# Altium PCB Control_Motor_Ciruit.PcbDoc
Units mil, origin at the board's own origin, x right, y up, seen from the top; angles counter-clockwise.
Board outline 5945 x 5270 mil, 2 copper layers (Top Layer, Bottom Layer); 47 components, 42 nets, 189 pads, 0 vias.
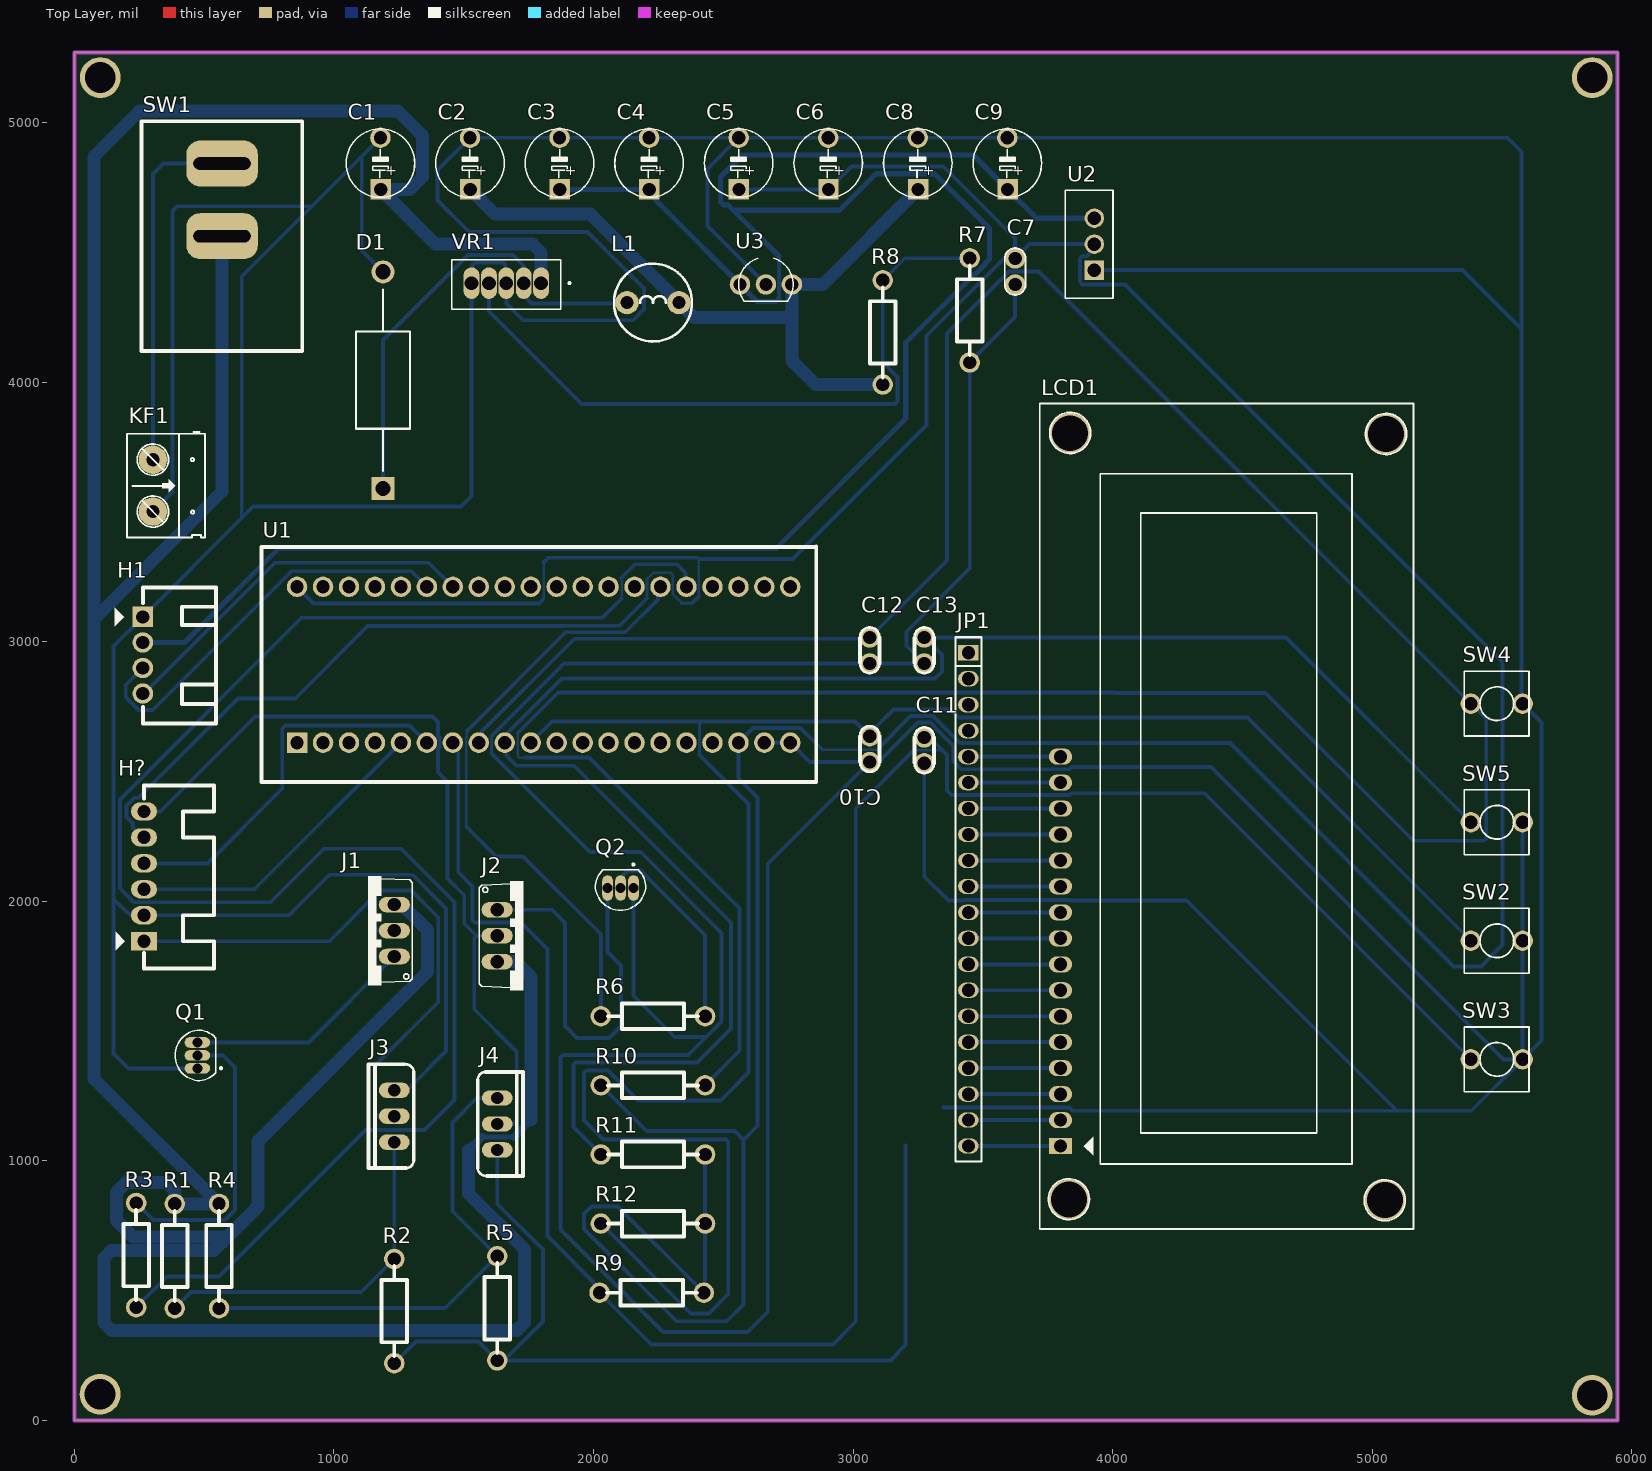
[diagram p0: Top Layer view]
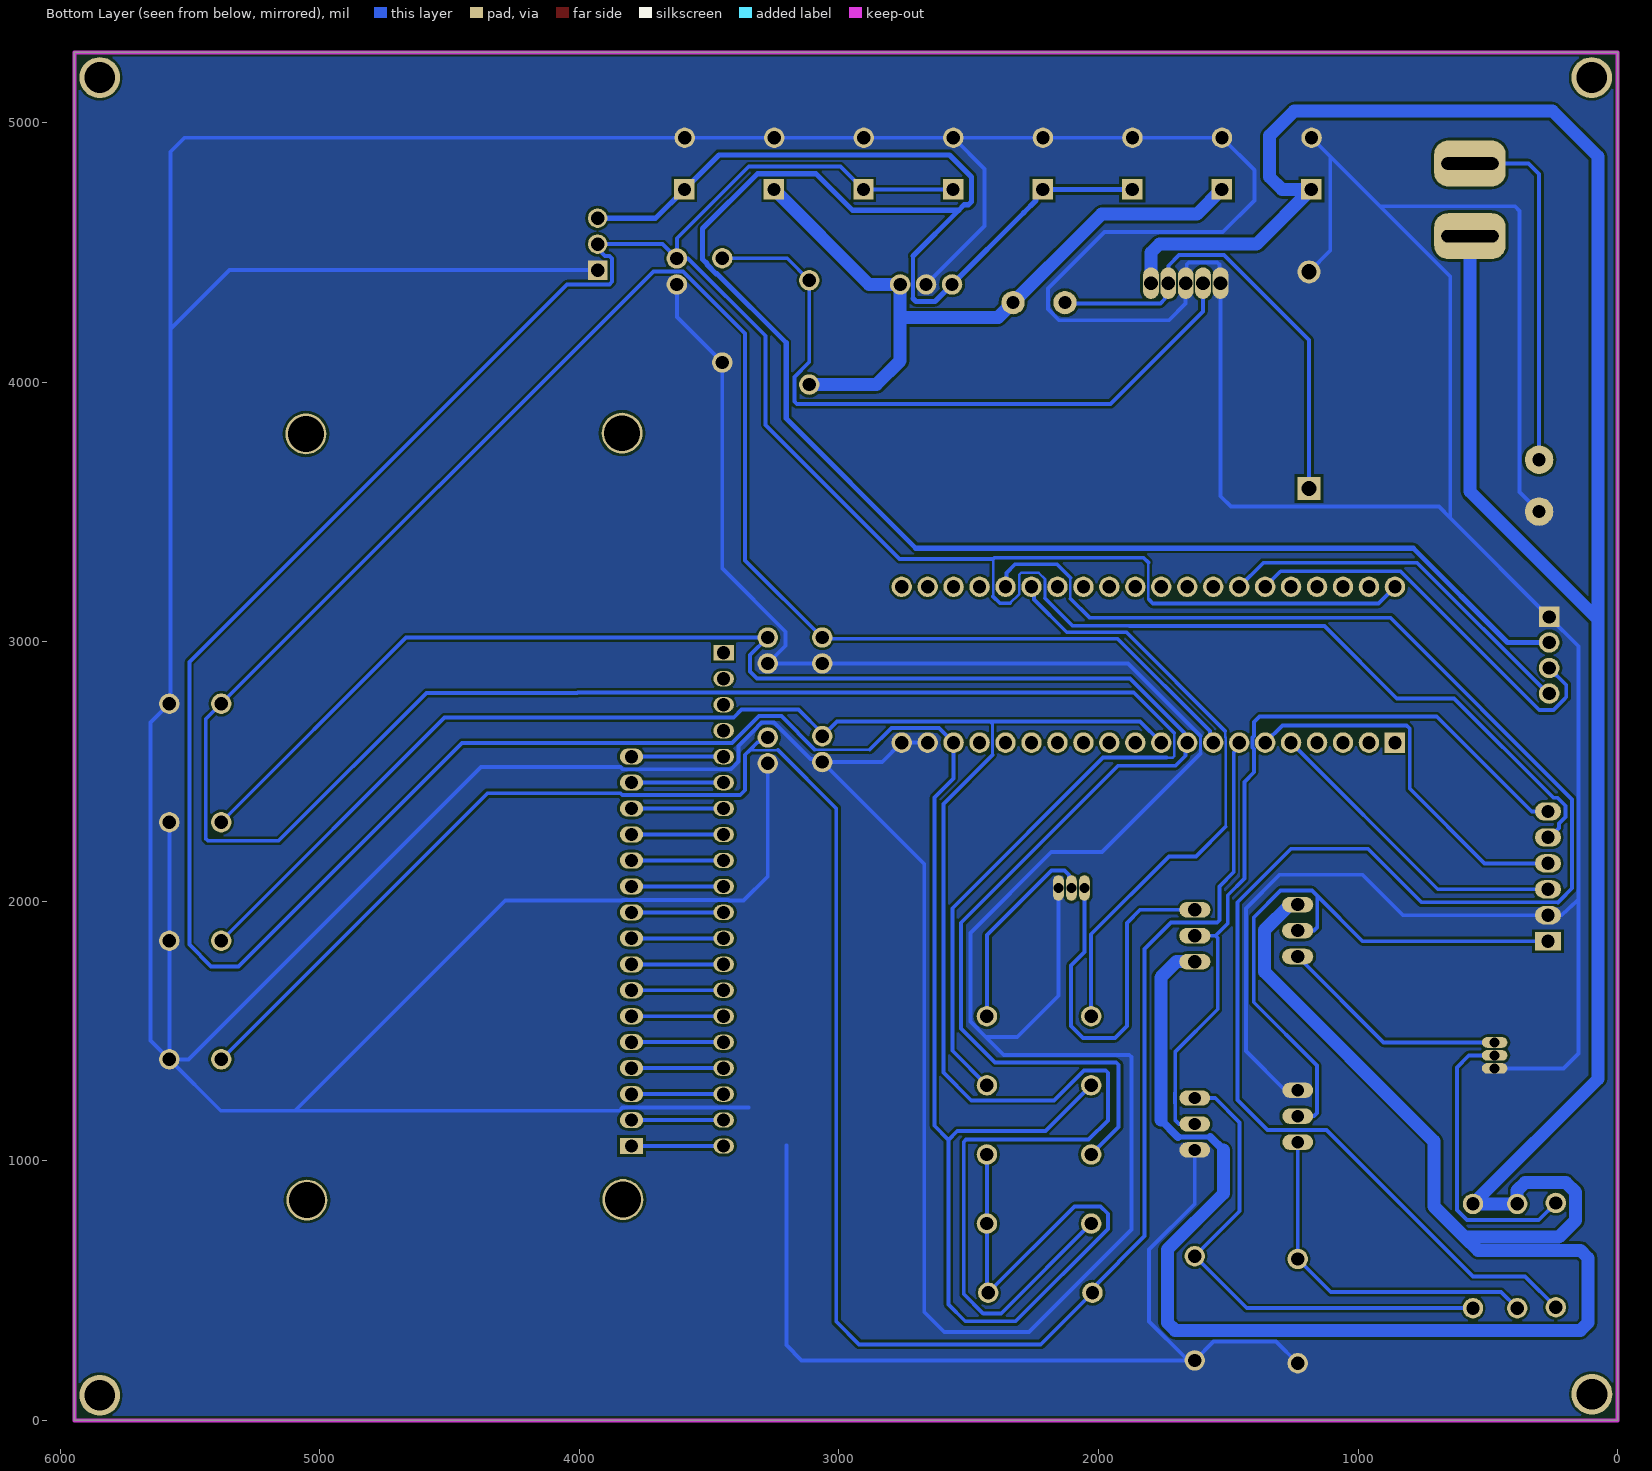
[diagram p1: Bottom Layer view, seen from below]
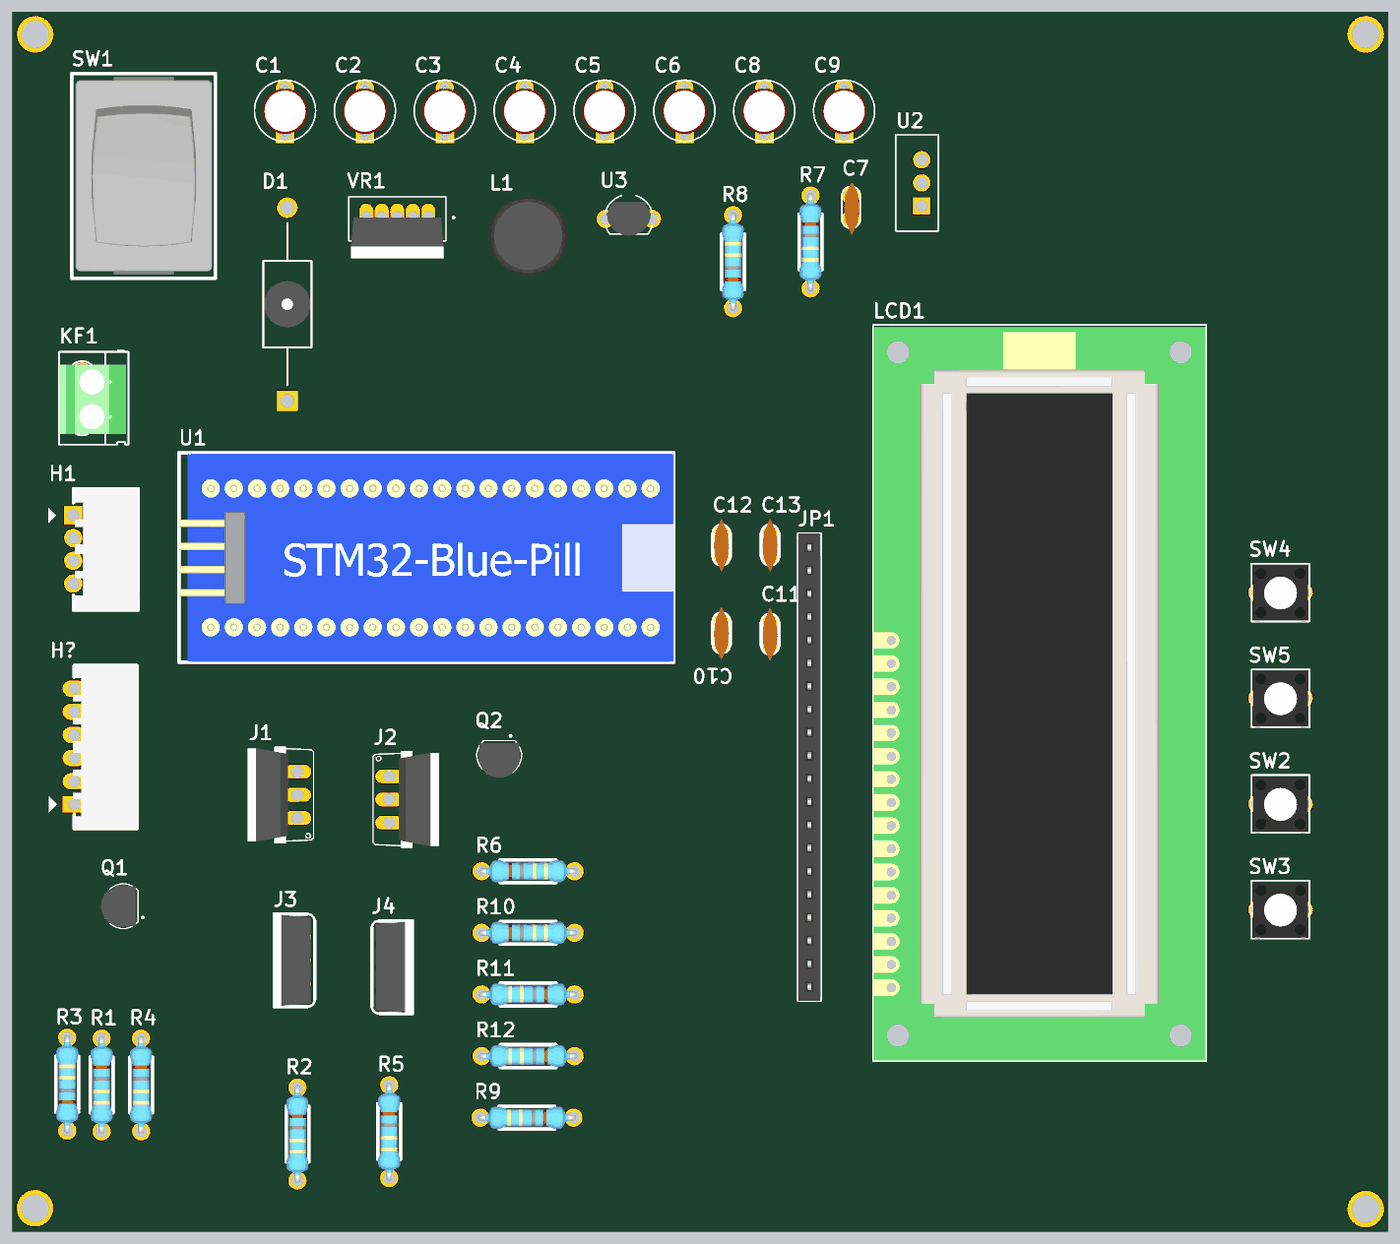
[diagram p2: 3D render of the assembled board from above, using the file's embedded part models]

## Layer stack, top to bottom
Top Solder: solder mask 0.4, Solder Resist, Dk 3.5
Top Layer: signal copper 1.4
Dielectric 1: dielectric 12.6, FR-4, Dk 4.8
Bottom Layer: signal copper 1.4
Bottom Solder: solder mask 0.4, Solder Resist, Dk 3.5

## Board outline
0,0 5945,0 5945,5270 0,5270

## Design rules (kind name [scope] priority, off if disabled: settings)
Clearance [All] p1: gap=10 ignorepadtopadclearanceinfootprint=FALSE
PolygonConnect PolygonConnect_2 [All vs IsNamedPolygon('GND_L02_P000')] p1: thpad.connectstyle=Direct thpad.reliefconductorwidth=10 thpad.reliefentries=4 thpad.polygonreliefangle="90 Angle" thpad.airgapwidth=10 smdpad.connectstyle=Relief smdpad.reliefconductorwidth=10 smdpad.reliefentries=4 smdpad.polygonreliefangle="90 Angle" smdpad.airgapwidth=10 via.connectstyle=Direct via.reliefconductorwidth=10 via.reliefentries=4 via.polygonreliefangle="90 Angle" via.airgapwidth=10
PolygonConnect PolygonConnect_1 [All vs IsNamedPolygon('GND_L02_P000')] p2: thpad.connectstyle=Direct thpad.reliefconductorwidth=10 thpad.reliefentries=4 thpad.polygonreliefangle="90 Angle" thpad.airgapwidth=10 smdpad.connectstyle=Relief smdpad.reliefconductorwidth=10 smdpad.reliefentries=4 smdpad.polygonreliefangle="90 Angle" smdpad.airgapwidth=10 via.connectstyle=Direct via.reliefconductorwidth=10 via.reliefentries=4 via.polygonreliefangle="90 Angle" via.airgapwidth=10
PolygonConnect [All] p3: connectstyle=Relief reliefconductorwidth=10 reliefentries=4 polygonreliefangle="90 Angle" airgapwidth=10
RoutingVias [All] p1: holewidth=51.18 width=50 viastyle="Through Hole" minholewidth=51.18 minwidth=50 maxholewidth=59.06 maxwidth=50
SolderMaskExpansion [All] p1: expansion=4 istentingtop=FALSE
Width [All] p1: maxlimit=60 minlimit=10 preferedwidth=15 toplayer_minwidth=15 minimp=50.000000 maximp=50.000000 favimp=50.000000
30 further rules are at their usual default settings.

## Components (designator, comment, footprint, x,y, rotation, side; value= is the part's Value field where it differs from the comment)
C1 "100uF" CA-ALU-5R 1179,4841 r90 top
C2 "300uF" CA-ALU-5R 1524,4841 r90 top
C3 "22uF" CA-ALU-5R 1869,4841 r90 top
C4 "100uF" CA-ALU-5R 2214,4841 r90 top
C5 "100uF" CA-ALU-5R 2559,4841 r90 top
C6 "22uF" CA-ALU-5R 2904,4841 r90 top
C7 "104" CN1 3624,4476 r270 top
C8 "100uF" CA-ALU-5R 3249,4841 r90 top
C9 "100uF" CA-ALU-5R 3594,4841 r90 top
C10 "105" "tu gom" 3064,2586 r270 top
C11 "105" "tu gom" 3274,2581 r270 top
C12 "105" "tu gom" 3064,2966 r270 top
C13 "105" "tu gom" 3274,2966 r270 top
D1 "1N5822" DIOAD2120W130L950D530P 1189,4007 r90 top
H1 "Header 4P 2.54 Duc Cong" "Header 4P DC 2.54" 265.02,3094.28 r0 top
H? "Header 6P 2.54 Duc Cong" "Header 6P DC 2.54" 268.5,1846 r0 top
J1 "IRF9630" TO220V 1132.49,1887 r90 top
J2 "IRF9630" TO220V 1729,1867 r270 top
J3 "IRFZ44EPBF" TO-220 1232.49,1172 r90 top
J4 "IRFZ44EPBF" TO-220 1629,1142 r270 top
JP1 "JP 1x20 2.54" "JP 1x20 CT" 3444,2957 r270 top
KF1 "CON 2 KF301" "Con 2 KF301 5.08" 302.77,3701 r270 top
L1 "68uH 3A" "CUON CAM 100uH3A" 2229,4306 r0 top
LCD1 "LCD16x2A" LCD16X2 3799,1057 r90 top
Q1 "2N3904" TO92127P495H495-3 474,1406 r90 top
Q2 "2N3904" TO92127P495H495-3 2104,2051 r180 top
R1 "1.5k" "tro vach 1/4w" 386.86,633.35 r90 top
R2 "10k" "tro vach 1/4w" 1232.49,421.21 r90 top
R3 "5k" "tro vach 1/4w" 238.21,636.89 r270 top
R4 "1.5k" "tro vach 1/4w" 557.29,633.35 r90 top
R5 "10k" "tro vach 1/4w" 1629,432 r90 top
R6 "5k" "tro vach 1/4w" 2229,1557 r180 top
R7 "3k" "tro vach 1/4w" 3449,4276 r90 top
R8 "12k" "tro vach 1/4w" 3114,4191 r270 top
R9 "10k" "tro vach 1/4w" 2224,492 r0 top
R10 "10k" "tro vach 1/4w" 2229,1290.75 r180 top
R11 "10k" "tro vach 1/4w" 2229,1024.5 r0 top
R12 "10k" "tro vach 1/4w" 2229,758.25 r0 top
SW1 "SWITCH 10A-2PIN" SW_2ARS_TH 568,4839.53 r0 top
SW2 "SW" SW2 5579,1847.67 r180 top value="SW chip 2 pin"
SW3 "SW" SW2 5579,1391 r180 top value="SW chip 2 pin"
SW4 "SW" SW2 5579,2761 r180 top value="SW chip 2 pin"
SW5 "SW" SW2 5579,2304.33 r180 top value="SW chip 2 pin"
U1 "Bluepill" "Blue Pill" 858,3211 r270 top
U2 "LM1117T-ADJ" TO254P470X1016X2222-3P 3889,4631 r90 top
U3 "78L05_5V" TO-92 2664,4376 r0 top
VR1 "LM2576T-ADJ" TO170P1067X483X1651-5 1664,4381 r180 top

## Footprints (in the part's own frame and the unit in brackets; to place one, negate y for a bottom-side part, rotate by r counter-clockwise, add the part's x,y. Pads: shape width x height; smd on the part's side, far side on the other; paste and mask are expansions set on the pad)
"Blue Pill" [mm]
  round 2 hole 1.3: 1(0,48.26) 2(0,45.72) 3(0,43.18) 4(0,40.64) 5(0,38.1) 6(0,35.56) 7(0,33.02) 8(0,30.48) 9(0,27.94) 10(0,25.4) 11(0,22.86) 12(0,20.32) 13(0,17.78) 14(0,15.24) 15(0,12.7) 16(0,10.16) 17(0,7.62) 18(0,5.08) 19(0,2.54) 20(0,0) 22(15.24,2.54) 23(15.24,5.08) 24(15.24,7.62) 25(15.24,10.16) 26(15.24,12.7) 27(15.24,15.24) 28(15.24,17.78) 29(15.24,20.32) 30(15.24,22.86) 31(15.24,25.4) 32(15.24,27.94) 33(15.24,30.48) 34(15.24,33.02) 35(15.24,35.56) 36(15.24,38.1) 37(15.24,40.64) 38(15.24,43.18) 39(15.24,45.72) 40(15.24,48.26)
  rect 2x2 hole 1.3: 21(15.24,0)
  silkscreen extent -3.94,-3.48 19.08,50.8, body extent -3.81,-3.48 19.05,50.8, height 3.56
CA-ALU-5R [mm]
  rect 2x2 hole 1.3: 1(-2.515,-0.025)
  round 2 hole 1.3: 2(2.54,0)
  silkscreen extent -3.3,-3.35 3.4,3.35, body extent -2.75,-2.5 2.75,2.5, height 14
CN1 [mm]
  round 2 hole 1.3: 1(0,0) 2(2.54,0)
  silkscreen extent -1.01,-1.02 3.58,1.02, body extent -1.52,-0.76 4.32,0.93, height 6.73
"Con 2 KF301 5.08" [mil]
  round 110 hole 51.18: 1(0,0) 2(200,0)
  silkscreen extent -106,-100 300,200, body extent -45,-97 255,190, height 335
"CUON CAM 100uH3A" [mil] "100uH3A"
  round 90 hole 51.18: 1(-100,0) 2(100,0)
  silkscreen extent -150,-150 150,150, body extent -171,-175 171,167, height 394
DIOAD2120W130L950D530P [mm]
  round 2.25 hole 1.5: A(10.6,0)
  rect 2.25x2.25 / inner round 2.25 / far side rect 2.25x2.25 hole 1.5: C(-10.6,0)
  silkscreen extent -8.89,-2.65 8.89,2.65, body extent -2.54,-2.54 2.54,2.54, height 30.16
"Header 4P DC 2.54" [mm]
  rect 2x2 hole 1.3: 1(-0.025,0.025)
  round 2 hole 1.3: 2(-0.025,-2.475) 3(-0.025,-4.975) 4(-0.025,-7.475)
  silkscreen extent -2.78,-10.39 7.11,2.92, body extent 0.13,-10.48 7.06,3.11, height 7.38
"Header 6P DC 2.54" [mil]
  rect 100x70 hole 51.18: 1(0,0)
  oval 100x70 hole 51.18: 2(0,100) 3(0,200) 4(0,300) 5(0,400) 6(0,500)
  silkscreen extent -110,-105 270,600, body extent -7,-110 278,605, height 227
"JP 1x20 CT" [mm] "20 row, straight, gold plating"
  rect 1.5x2 hole 1.3: 1(0,0)
  oval 1.5x2 hole 1.3: 2(2.54,0) 3(5.08,0) 4(7.62,0) 5(10.16,0) 6(12.7,0) 7(15.24,0) 8(17.78,0) 9(20.32,0) 10(22.86,0) 11(25.4,0) 12(27.94,0) 13(30.48,0) 14(33.02,0) 15(35.56,0) 16(38.1,0) 17(40.64,0) 18(43.18,0) 19(45.72,0) 20(48.26,0)
  silkscreen extent -1.52,-1.27 49.78,1.27, body extent -1.52,-1.25 49.78,1.25, height 8.51
LCD16X2 [mil] "LCD dipslay 16x2, 16 pin"
  rect 62x90 hole 51.18: 1(0,0)
  oval 62x90 hole 51.18: 2(100,0) 3(200,0) 4(300,0) 5(400,0) 6(500,0) 7(600,0) 8(700,0) 9(800,0) 10(900,0) 11(1000,0) 12(1100,0) 13(1200,0) 14(1300,0) 15(1400,0) 16(1500,0)
  round 157.48 hole 137.8: "Hole 0"(-208,-1250) "Hole 0"(-206,-33) "Hole 0"(2743,-1254) "Hole 0"(2746,-36)
  silkscreen extent -320,-1360 2860,80, body extent -318,-1357 2851,80, height 670
SW2 [mm] "SW button 2pin, 250x 250 mil"
  round 2 hole 1.3: 1(0,0) 2(5.08,0)
  silkscreen extent -0.64,-3.17 5.72,3.18, body extent -0.46,-2.95 5.54,3.25, height 5
SW_2ARS_TH [mm] "CASE: TH"
  rrect60% 7x4.5 hole 1.2 slot 5.6 at 0 deg mask+0.076: 1(0.025,0.051) 2(0.025,-7.049)
  silkscreen extent -7.87,-18.29 7.87,4.19, body extent -7.47,-17.9 7.53,3.8, height 17.81
TO170P1067X483X1651-5 [mm]
  oval 1.55x3.1 hole 1.34: 1(-3.4,0) 2(-1.7,0) 3(0,0) 4(1.7,0) 5(3.4,0)
  silkscreen extent -6.27,-2.29 5.34,2.54, body extent -5.08,0 5.08,4.45, height 16.84
TO220V [mil]
  oval 60x120 hole 51.18: 1(-100,-100) 2(0,-100) 3(100,-100)
  silkscreen extent -210,-170 210,0, body extent -202,-60 202,115, height 783
TO254P470X1016X2222-3P [mil]
  rect 75x75 hole 51.18: 1(-200,-40)
  round 75 hole 51.18: 2(-100,-40) 3(0,-40)
  silkscreen extent -308,-112 108,72
TO92127P495H495-3 [mm]
  oval 1.04x2.5 hole 1: 1(-1.27,0) 2(0,0) 3(1.27,0)
  silkscreen extent -2.48,-2.4 2.48,2.16, body extent -2.28,-1.55 2.28,2.28, height 20.44
TO-92 [mm]
  round 2 hole 1.3: 1(-2.54,0) 2(0,0) 3(2.54,0)
  silkscreen extent -2.66,-1.65 2.66,2.55, body extent -2.41,-1.84 2.41,1.84, height 5.34
TO-220 [mm]
  oval 1.508x3.016 hole 1.2: 1(-2.54,0) 2(0,0) 3(2.54,0)
  silkscreen extent -5.08,-1.91 5.08,2.54, body extent -5.08,-1.47 5.08,2.72, height 20.57
"tro vach 1/4w" [mm]
  round 2 hole 1.3: 1(-5.1,0) 2(5.1,0)
  silkscreen extent -4.39,-1.25 4.42,1.25, body extent -5.38,-1.2 5.38,1.2, height 2.41
"tu gom" [mm] "Tu gom mini"
  round 2 hole 1.3: 1(-1.27,0) 2(1.27,0)
  silkscreen extent -2.25,-0.97 2.22,0.97, body extent -2.92,-0.85 2.92,0.85, height 6.12

## Part data
C1 C2 C8 C9: library part "Tu Nhom 100uF 16V", "Dán", Chung_Loai=Dán, Don_Vi=Con, Ma_Hang=MH002219, So_Chan=2, Ten_Linh_Kien="Tụ Nhôm 100uF 16V 6.3x5.4MM"
C3 C6: library part "Tu tantalum 22uF 25V SMD6032", "Dán", Chung_Loai=Dán, Don_Vi=Con, Ma_Hang=MH002651, So_Chan=2, Ten_Linh_Kien="Tụ tantalum 226E-22uF 25V SMD6032"
C4 C5: library part "Tu tantalum 100uF 10V SMD6032", "Dán", Chung_Loai=Dán, Don_Vi=Con, Ma_Hang=MH007594, So_Chan=2, Ten_Linh_Kien="Tụ tantalum 107A-100uF 10V SMD6032"
C7: library part "Tu 0603 104 50V 10%", "Dán", Chung_Loai=Dán, Don_Vi=Con, Ma_Hang=MH004568, So_Chan=2, Ten_Linh_Kien="Tụ 0603 104-100nF 10% 50V"
C10 C11 C12 C13: library part "Tu gom 104 50V", "Cắm", Chung_Loai=Cắm, Don_Vi=Con, Ma_Hang=MH004761, So_Chan=2, Ten_Linh_Kien="Tụ gốm 104 100nF 50V"
D1: "Diode Schottky 40 V 3A Through Hole DO-201AD", Package="DO-201 STMicroelectronics", Availability="In Stock", Check_prices=https://www.snapeda.com/parts/1N5822/STMicroelectronics/view-part/?ref=eda, MF=STMicroelectronics, MP=1N5822, Price=None, Purchase-URL=https://pricing.snapeda.com/search/part/1N5822/?ref=eda, SnapEDA_Link=https://www.snapeda.com/parts/1N5822/STMicroelectronics/view-part/?ref=snap
H1 H? KF1: "Cắm", Chung_Loai=Cắm, Don_Vi=Con
  H1: Ma_Hang=MH001310, Ten_Linh_Kien="Header 4P XH2.54-4P Đực Cong"
  H?: Ma_Hang=MH003363, Ten_Linh_Kien="Header 6P XH2.54-6P Đực Cong"
  KF1: Ma_Hang=MH000987, Ten_Linh_Kien="CON 2 KF301-2P 5.08MM Xanh Dương"
J1 J2: "Trans MOSFET P-CH 200V 6.5A 3-Pin(3+Tab) TO-220AB Trans MOSFET P-CH 200V 6.5A 3-Pin(3+Tab) TO-220AB Trans MOSFET P-CH 200V 6.5A 3-Pin(3+Tab) TO-220AB", Package="TO-220-3 Vishay", Availability="In Stock", Check_prices=https://www.snapeda.com/parts/IRF9630/Vishay+Siliconix/view-part/?ref=eda, MF="Vishay Siliconix", MP=IRF9630, Price=None, Purchase-URL=https://pricing.snapeda.com/search/part/IRF9630/?ref=eda, SnapEDA_Link=https://www.snapeda.com/parts/IRF9630/Vishay+Siliconix/view-part/?ref=snap
J3 J4: "N-Channel 60 V 48A (Tc) 110W (Tc) Through Hole TO-220AB", Package="TO-220-3 Infineon", Availability="In Stock", Check_prices=https://www.snapeda.com/parts/IRFZ44EPBF/Infineon+Technologies/view-part/?ref=eda, MF=Infineon, MP=IRFZ44EPBF, Price=None, Purchase-URL=https://pricing.snapeda.com/search/part/IRFZ44EPBF/?ref=eda, SnapEDA_Link=https://www.snapeda.com/parts/IRFZ44EPBF/Infineon+Technologies/view-part/?ref=snap
JP1: library part "JP 1x20 2.54 Cai Thang", "Cắm", Chung_Loai=Cắm, Don_Vi=Con, Ma_Hang=MH004006, Ten_Linh_Kien="Jump Đơn Cái 2.54MM 1x20P Thẳng"
L1: library part "CUON CAM 100uH DIP", "Dán", Chung_Loai=Dán, Don_Vi=Con, Ma_Hang=MH002209, Ten_Linh_Kien="Cuộn Cảm 100uH 3A 8x10MM"
LCD1: library part LCD16x2, "LCD dipslay 16 char, 2 line"
Q1 Q2: "TRANS NPN 40V 200MA TO92-3", Package="TO-226-3 Rectron", Availability="In Stock", Check_prices=https://www.snapeda.com/parts/2N3904/Rectron/view-part/?ref=eda, MF=Rectron, MP=2N3904, Price=None, Purchase-URL=https://pricing.snapeda.com/search/part/2N3904/?ref=eda, SnapEDA_Link=https://www.snapeda.com/parts/2N3904/Rectron/view-part/?ref=snap
R1 R3 R4 R6: library part "Tro Vach 1/4W 5% 1.5k", "Cắm", Chung_Loai=Cắm, Don_Vi=Con, Ma_Hang=MH007284, So_Chan=2, Ten_Linh_Kien="Trở Vạch 1/4w 5% 1.5k"
R2 R5 R9 R10 R11 R12: library part "Tro Vach 1/4W 5% 10k", "Căm", Chung_Loai=Cắm, Don_Vi=Con, Ma_Hang=MH007354, So_Chan=2, Ten_Linh_Kien="Trở Vạch 1/4w 5% 10K"
R7: library part "Tro Vach 1/4W 5% 2.2k", "Cắm", Chung_Loai=Cắm, Don_Vi=Con, Ma_Hang=MH007293, So_Chan=2, Ten_Linh_Kien="Trở Vạch 1/4w 5% 2.2k"
R8: library part "Tro Vach 1/4W 5% 12k", "Cắm", Chung_Loai=Cắm, Don_Vi=Con, Ma_Hang=MH007389, So_Chan=2, Ten_Linh_Kien="Trở Vạch 1/4w 5% 12k"
SW1: library part SW1_RS-471005264153-TH, "Rocker Switch SPST 16A (AC), 10A (DC) 250V Panel Mount, Snap-In", Alternate Part Number-1=NA, Case/Package=TH, Manufacturer="Würth Elektronik", Manufacturer Part Number=471005264153, Supplier Part Number-1=471005264153, Supplier-1="Würth Elektronik"
SW2 SW3 SW4 SW5: library part SW2, "Switch button 2 pin"
U1: library part STM32F103C8T6, "STM32F103C8T6"
U2: "Linear Voltage Regulator IC 1 Output 800mA TO-220-3", Package="TO-220 National Semiconductor", Availability=Unavailable, MF="Texas Instruments", MP=LM1117TADJ, Price=None, SnapEDA_Link=https://www.snapeda.com/parts/LM1117TADJ/Texas%20Instruments/view-part/20524/?ref=snap
U3: library part 78L05ACZ, "Linear Voltage Regulator IC Positive Fixed 1 Output 100mA TO-92-3", Package="TO-92 ON", Availability="In Stock", Check_prices=https://www.snapeda.com/parts/78L05ACZ/STMicroelectronics/view-part/?ref=eda, MF=STMicroelectronics, MP=78L05ACZ, Price=None, Purchase-URL=https://pricing.snapeda.com/search/part/78L05ACZ/?ref=eda, SnapEDA_Link=https://www.snapeda.com/parts/78L05ACZ/STMicroelectronics/view-part/?ref=snap
VR1: "SIMPLE SWITCHER&reg; 40V, 3A Low Component Count Step-Down Regulator 5-TO-220 -40 to 125", Package="TO-220-5 Texas Instruments", Availability="In Stock", Check_prices=https://www.snapeda.com/parts/LM2576T-ADJ/Texas+Instruments/view-part/?ref=eda, MF="Texas Instruments", MP=LM2576T-ADJ, Price=None, Purchase-URL=https://pricing.snapeda.com/search/part/LM2576T-ADJ/?ref=eda, SnapEDA_Link=https://www.snapeda.com/parts/LM2576T-ADJ/Texas+Instruments/view-part/?ref=snap

## Free pads (board coordinates)
  round 157.48 hole 118.11: 3(99,101) 3(100,5173) 3(5847,97) 3(5847,5173)

## Nets (pads, with @x,y where several pads share a name; then routed paths per layer and width w, separated by ;. In a path a pad name is that pad's centre, name@x,y a point inside that pad or via, vN(x,y) a via of type N, cw(c..) or ccw(c..) an arc to the next point about the centre after c; other vN are vias at no path point)
5v: C2.1 C8.1 L1.2 R8.2 U3.3 | length 2762.8
  Bottom Layer w50: C2.1 1619.67,4647.33 1987.67,4647.33 2386,4249 2764,4249 ; R8.2 2855.79,3990.21 2764,4082 2764,4249 ; C8.1 2884,4376 U3.3 2764,4249
+12: C1.1 J1.3 J2.3 R1.2 R4.2 SW1.2 VR1.1 | length 15327.1
  Bottom Layer w20: 1569,1092 1694,1092
  Bottom Layer w30: 1518.54,1041.54 1569,1092 ; 1694,1092 1760,1158
  Bottom Layer w50: SW1.2 569,3578 76,3085 ; J1.3 1262.49,1987 1359.5,1889.99 1359.5,1727.5 708,1076 708,824.75 589.25,706 ; 1518.54,1041.54 1518.54,874.46 1734,659 1734,376.29 1704.71,347 143.29,347 114,376.29 114,625.71 143.29,655 538.25,655 589.25,706 ; J2.3 1700,1767 1760,1707 1760,1158 ; VR1.1 1797.86,4498.71 1765.07,4531.5 1390.5,4531.5 C1.1 1293,4742 1341,4790 1341,4949 1246,5044 251,5044 76,4869 76,3085 ; 76,3085 76,1315.43 R4.2 R1.2 386.86,886.14 357,916 199,916 162,879 162,771 227,706 589.25,706
Encoder_A: H?.3 U1.25 | length 1223.5
  Bottom Layer w15: H?.3 693,2046 U1.25
Encoder_B: H?.4 U1.26 | length 1472.3
  Bottom Layer w15: H?.4 513,2146 801,2434 801,2665 813.18,2677.18 1291.82,2677.18 U1.26
GND: C1.2 C2.2 C3.2 C4.2 C5.2 C6.2 C7.2 C8.2 C9.2 C10.2 C11.2 C12.2 C13.2 D1.A H1.1 H?.2 J3.3 J4.3 KF1.2 Q1.1 Q2.1 R2.1 R5.1 R7.1 SW2.1 SW3.1 SW4.1 SW5.1 U1.39 U1.40 U2.1 U3.2 VR1.3 VR1.5 | length 46439.5
  Bottom Layer w10: 1607,2569 1607,2636.89 ; 1886.11,2916 1892,2916
  Bottom Layer w15: KF1.2 378,3576.23 378,4659 396,4677 915,4677 ; Q1.1 207.97,1356 151,1412.97 151,2007.43 ; C1.2 1107,4869 ; D1.A 1107,4506.32 1107,4869 ; R2.1 1316.07,304 1556.21,304 R5.1 ; J3.3 1281,1272 1432,1423 1432,1972 1302,2102 983,2102 827,1946 H?.2 215.71,1946 151,2007.43 ; 1607,2569 1987,2189 2182,2189 2493,1878 2493,1536 2434,1477 ; 1607,2636.89 1886.11,2916 ; J4.3 1629,834 1805.16,657.84 1805.16,381.16 1667.41,243.41 1658.44,243.41 1655.21,240.18 R5.1@1655.21,231.21 ; R5.1@1635.76,231.21 R5.1@1655.21,231.21 ; 1892,2916 C12.2 C13.2 3206,2984 3206,3038 3449,3281 R7.1 3624,4250.21 C7.2 ; Q2.1 2154,1636 2313,1477 2434,1477 ; U1.39 U1.40 2833,2536 C10.2 ; U3.2 2439,4601 2439,4821 C5.2 ; 3202,1059 3202,290 3143.21,231.21 R5.1@1655.21,231.21 ; C11.2 3274,2096 3367,2003 3422.94,2003 3425.44,2005.5 3833.09,2005.5 3835.59,2003 4285,2003 5095,1193 ; 3348.5,1205.5 3833.09,1205.5 3845.59,1193 5095,1193 ; U2.1 5347,4431 5574,4204 ; SW5.1 SW2.1 SW3.1 ; 151,2007.43 151,2982.25 H1.1 645,3476.25 ; 645,3476.25 688.75,3520 1490.14,3520 1530.14,3560 VR1.5 1534.41,4385.27 1534.41,4452.21 1543.2,4461 1650.94,4461 1659.73,4452.21 1659.73,4385.27 VR1.3 1664,4302 1728,4238 2152,4238 2195,4281 2195,4360 1977.16,4577.84 1521.16,4577.84 1399,4700 1399,4816 C2.2 C3.2 C4.2 C5.2 ; 645,3476.25 645,4407 915,4677 ; 915,4677 1107,4869 ; 2434,1477 2365,1408 1881.79,1408 1873,1399.21 1873,735 2267,341 2594,341 2671,418 2671,2143 C10.2 ; C5.2 C6.2 C8.2 C9.2 5520,4941 5574,4887 5574,4204 ; C10.2 3075.75,2547.75 3109.75,2547.75 3249.87,2687.87 3297.56,2687.87 3330.87,2654.56 3330.87,2654.13 3387.13,2597.87 3387.13,2537.52 3416.15,2508.5 3833.09,2508.5 3841.59,2517 4379.11,2517 5505.11,1391 SW3.1 ; 5095,1193 5381,1193 SW3.1 ; 5574,4204 5574,2766 5652,2688 5652,1464 SW3.1
INT_A: C11.1 R9.1 SW3.2 U1.27 | length 8669.1
  Bottom Layer w10: 3235,2582 3340.75,2582 3341.87,2583.13
  Bottom Layer w15: U1.27 1458,2593.75 1479,2572.75 1479,2112 1534,2057 1534,1926.79 1542.79,1918 1720,1918 1822,1816 1822,710 2023.21,508.79 R9.1 2222.21,293 2922,293 3010,381 3010,2357 3235,2582 ; C11.1 3291.25,2631 3310,2612.25 3312.75,2612.25 3341.87,2583.13 3360.83,2564.17 3360.83,2427.46 3379.79,2408.5 3833.09,2408.5 3840.59,2416 4354,2416 SW3.2
INT_B: C12.1 R10.1 SW4.2 U1.28 | length 12297.7
  Bottom Layer w10: 1708,2648.18 1708,2558.86 1713.86,2553 1738,2553
  Bottom Layer w15: U1.28 1570.2,2623.2 1570.2,2655.2 1926,3011 3059,3011 3361,3313 3361,4187 3600,4426 3714,4426 SW4.2 5439,2701 5439,2241.79 5430.21,2233 5158,2233 4589,2802 4007.89,2802 4005.47,2804.42 1883.42,2804.42 1864.24,2804.42 1708,2648.18 ; 1738,2553 1983,2553 2563,1973 2563,1423.96 R10.1
INT_C: C13.1 R11.1 SW5.2 U1.29 | length 7018.7
  Bottom Layer w15: R11.1 1923,1129.71 1923,1370.21 1931.79,1379 2399,1379 2530,1510 2530,1917 1925,2522 1703,2522 1664.75,2560.25 1664.75,2604.25 U1.29 1670.2,2623.2 1670.2,2650.2 1878,2858 3315,2858 3342,2885 3342,2948 C13.1 4667.33,3016 SW5.2
INT_D: C10.1 R12.1 SW2.2 U1.30 | length 8283.3
  Bottom Layer w10: 2408,2563 2408,2684 2409,2685
  Bottom Layer w15: U1.30 1839.87,2692.87 2416.87,2692.87 ; R12.1 2374.46,412 2444,412 2519,487 2519,1073.21 2510.21,1082 2038,1082 1964,1156 1964,1339.21 1972.79,1348 2056,1348 2171,1233 2490,1233 2597,1340 2597,2374 2408,2563 ; 2409,2685 2416.87,2692.87 ; SW2.2 4518.67,2708 3405,2708 3375.13,2737.87 3154.87,2737.87 3064,2647 C10.1 3007.13,2692.87 2416.87,2692.87
NetD1_C: D1.C L1.1 VR1.2 | length 1793.9
  Bottom Layer w15: D1.C 1189,4162 1516,4489 1690,4489 1730.93,4448.07 1730.93,4338.03 1744.67,4324.29 1744.67,4319.26 1761.45,4302.48 2125.48,4302.48 L1.1
NetJ1_1: J1.1 Q1.3 | length 895.6
  Bottom Layer w15: Q1.3 901.49,1456 J1.1
NetJ2_1: J2.1 Q2.3 | length 1485.1
  Bottom Layer w15: J2.1 1840,1967 1890.4,1916.6 1890.4,1520 1936.8,1473.6 2059.36,1473.6 2105.77,1520 2105.77,1752.23 2054,1804 Q2.3
NetJ3_1: J3.1 R1.1 R2.2 | length 1374.1
  Bottom Layer w15: R1.1 449.1,494.81 1105.3,494.81 R2.2 J3.1
NetJ4_1: J4.1 R4.1 R5.2 | length 1953.5
  Bottom Layer w15: R4.1 1428.77,432.56 R5.2 1456,805.79 1456,1148 1550,1242 J4.1
NetJP1_5: JP1.5 LCD1.16 | length 355
  Bottom Layer w15: JP1.5 LCD1.16
NetJP1_6: JP1.6 LCD1.15 | length 355
  Bottom Layer w15: JP1.6 LCD1.15
NetJP1_7: JP1.7 LCD1.14 | length 355
  Bottom Layer w15: JP1.7 LCD1.14
NetJP1_8: JP1.8 LCD1.13 | length 355
  Bottom Layer w15: JP1.8 LCD1.13
NetJP1_9: JP1.9 LCD1.12 | length 355
  Bottom Layer w15: JP1.9 LCD1.12
NetJP1_10: JP1.10 LCD1.11 | length 355
  Bottom Layer w15: JP1.10 LCD1.11
NetJP1_11: JP1.11 LCD1.10 | length 355
  Bottom Layer w15: JP1.11 LCD1.10
NetJP1_12: JP1.12 LCD1.9 | length 355
  Bottom Layer w15: JP1.12 LCD1.9
NetJP1_13: JP1.13 LCD1.8 | length 355
  Bottom Layer w15: JP1.13 LCD1.8
NetJP1_14: JP1.14 LCD1.7 | length 355
  Bottom Layer w15: JP1.14 LCD1.7
NetJP1_15: JP1.15 LCD1.6 | length 355
  Bottom Layer w15: JP1.15 LCD1.6
NetJP1_16: JP1.16 LCD1.5 | length 355
  Bottom Layer w15: JP1.16 LCD1.5
NetJP1_17: JP1.17 LCD1.4 | length 355
  Bottom Layer w15: JP1.17 LCD1.4
NetJP1_18: JP1.18 LCD1.3 | length 355
  Bottom Layer w15: JP1.18 LCD1.3
NetJP1_19: JP1.19 LCD1.2 | length 355
  Bottom Layer w15: JP1.19 LCD1.2
NetJP1_20: JP1.20 LCD1.1 | length 355
  Bottom Layer w15: JP1.20 LCD1.1
NetKF1_1: KF1.1 SW1.1 | length 1382.9
  Bottom Layer w15: KF1.1 302.77,4800.77 343.53,4841.53 SW1.1
NetQ1_2: Q1.2 R3.1 | length 1138.6
  Bottom Layer w15: R3.1 304,771.89 580.89,771.89 619.54,810.54 619.54,1360 573.54,1406 Q1.2
NetQ2_2: Q2.2 R6.1 | length 792
  Bottom Layer w15: Q2.2 2104,2086.76 2113.77,2096.53 2113.77,2100.74 2130.75,2117.71 2181.29,2117.71 2429.79,1869.21 R6.1
NetR7_2: R7.2 R8.1 VR1.4 | length 2694.7
  Bottom Layer w15: VR1.4 1597.07,4272 1953.07,3916 3162.08,3916 3170.87,3924.79 3170.87,4019.95 3114,4076.82 R8.1 3199,4476.79 R7.2
OUT1: H?.1 J1.2 J3.2 | length 2392.3
  Bottom Layer w15: H?.1 983,1846 1157,2020 ; J3.2 1170,1172 1158,1184 1158,1367 1402,1611 1402,1938 1299,2041 1178,2041 1157,2020 ; J1.2 1170,1887 1157,1900 1157,2020
OUT2: H?.6 J2.2 J4.2 | length 3126.2
  Bottom Layer w15: H?.6 331,2346 697,2712 1379,2712 1401,2690 1401,2635.7 1405.87,2630.83 1405.87,2591.17 1401,2586.3 1401,2497 1438.16,2459.84 1438.16,2086.84 1502,2023 1502,1914.18 1549.18,1867 ; J4.2 1690,1142 1704,1156 1704,1220.59 1705.87,1222.46 1705.87,1261.54 1704,1263.41 1704,1420.43 1540.39,1584.03 1540.39,1858.21 1549.18,1867 ; J2.2 1549.18,1867
PWM1: R3.2 U1.5 | length 6813.3
  Bottom Layer w10: 2108,3165 2108,3246
  Bottom Layer w15: 229.63,1995.63 201,2024.25 201,2025 176,2050 176,2392.19 876,3092.19 2035.19,3092.19 2108,3165 ; 230,1996 756,1996 962,2202 1259,2202 1465,1996 1465,1235 1349,1119 1281.91,1119 1281.72,1119.19 1183.26,1119.19 1183.08,1119 1122,1119 558,555 357.11,555 R3.2 ; 2108,3246 2160,3298 2321,3298 2354.92,3264.08 2354.92,3214.08 U1.5
PWM2: R6.2 U1.6 | length 2374
  Bottom Layer w10: 1510.13,2286.87 1510.13,2630.83 1512,2632.7 1512,2656
  Bottom Layer w15: 1510.13,2286.87 1625,2172 1729,2172 2028.21,1872.79 R6.2 ; 1512,2656 1892,3036 2122,3036 2248.75,3162.75 2248.75,3201.75 U1.6
SCL: H1.4 U1.14 | length 1441.3
  Bottom Layer w15: H1.4 269,2800 773,3304 1365,3304 U1.14
SDA: H1.3 U1.15 | length 1567.2
  Bottom Layer w15: H1.3 198,2832.4 198,2787 207.15,2777.85 207.15,2776.44 247.6,2736 302,2736 837,3271 1298,3271 U1.15
VCC3V3: C5.1 C6.1 C7.1 H?.5 R9.2 R10.2 R11.2 R12.2 U1.20 U1.38 U2.2 | length 20109.2
  Bottom Layer w10: 1804.11,3160.11 1808,3164 1808,3305 ; 2206,3167 2206,3241 2230.37,3265.37 2297.64,3265.37 2305.87,3257.14 2305.87,3182.13 2340,3148 ; 2406,3174 2406,3318 ; 2881,2584 3088.85,2584 3089.64,2584.79 3093.22,2584.79
  Bottom Layer w15: H?.5 262.29,2246 226,2282.29 226,2299.25 201,2324.25 201,2367.75 231.75,2398.5 247.5,2398.5 630,2781 851,2781 1130,3060 1880.64,3060 1881.64,3061 2100,3061 2206,3167 ; U1.20 922,3147 1791,3147 1804.11,3160.11 ; 1808,3305 1826,3323 2401,3323 2406,3318 2767,3318 3283,3834 3283,4178.36 3580.64,4476 C7.1 ; R10.2 2203.96,1115 2544,1115 2578,1081 ; 2340,3148 2380,3148 2406,3174 ; R11.2 R12.2 2429.79,497 R9.2 2092.79,824 1992,824 1964,796 1964,736.94 2318.94,382 2513,382 2578,447 2578,1081 ; C5.1 C6.1 2994,4831 3347,4831 3624,4554 C7.1 ; 2881,2584 2797.13,2667.87 2634.44,2667.87 2633.57,2667 2614,2667 U1.38 2558,2473 2632,2399 2632,1135 2578,1081 ; 3093.22,2584.79 3221.3,2712.87 3307.91,2712.87 3411.2,2609.58 4452.42,2609.58 5313,1749 5418,1749 5502,1833 5502,2921 4047,4376 3884.25,4376 3874,4386.25 3874,4475.75 3884.25,4486 3901.57,4486 3910.36,4494.79 3910.36,4496.12 3929,4514.76 U2.2 3679,4531 C7.1
VCC5V: C3.1 C4.1 C9.1 H1.2 U2.3 U3.1 | length 8482.9
  Bottom Layer w15: 2715,4321.72 2715,4485.16
  Bottom Layer w20: H1.2 424,2996.85 787.15,3360 2704,3360 3203,3859 3203,4151 3469.42,4417.42 3473.59,4417.42 3508.37,4452.2 3508.37,4456.37 3525,4473 3525,4591 3314,4802 3088,4802 2948,4662 2538.16,4662 ; C3.1 C4.1 2241,4716 2241,4699 2288,4652 U3.1 2630,4310 2703.28,4310 2715,4321.72 ; 2715,4485.16 2538.16,4662 ; U2.3 3706,4631 C9.1 3462,4875 2574,4875 2489,4790 2489,4694.35 2500.72,4682.63 2517.53,4682.63 2538.16,4662
pads on no net: "LCD1.Hole 0" JP1.1 JP1.2 JP1.3 JP1.4 U1.1 U1.2 U1.3 U1.4 U1.7 U1.8 U1.9 U1.10 U1.11 U1.12 U1.13 U1.16 U1.17 U1.18 U1.19 U1.21 U1.22 U1.23 U1.24 U1.31 U1.32 U1.33 U1.34 U1.35 U1.36 U1.37

## Polygon pours and split planes (outlines as drawn)
GND on Bottom Layer "GND_L02_P000" (solid, pour order 0): 0,0 5945,0 5945,5270 0,5270

## Keep-outs
Keep-Out Layer:
  the board outline again, w15

## Text inside footprints (layer, text, board x,y; h text height)
C1: Top Overlay "+" at 1239,4791 h40 r90
C2: Top Overlay "+" at 1584,4791 h40 r90
C3: Top Overlay "+" at 1929,4791 h40 r90
C4: Top Overlay "+" at 2274,4791 h40 r90
C5: Top Overlay "+" at 2619,4791 h40 r90
C6: Top Overlay "+" at 2964,4791 h40 r90
C8: Top Overlay "+" at 3309,4791 h40 r90
C9: Top Overlay "+" at 3654,4791 h40 r90
J1: Mechanical 13 "1" at 1257.49,1762 h50 r90; Mechanical 13 "2" at 1257.49,1862 h50 r90; Mechanical 13 "3" at 1257.49,1962 h50 r90
J2: Mechanical 13 "1" at 1604,1992 h50 r270; Mechanical 13 "2" at 1604,1892 h50 r270; Mechanical 13 "3" at 1604,1792 h50 r270